# Altium PCB Daughter_Card.PcbDoc
Units mm, origin at the board's own origin, x right, y up, seen from the top; angles counter-clockwise.
Board outline 20.07 x 80.77 mm, 2 copper layers (Top Layer, Bottom Layer); 39 components, 14 nets, 102 pads, 39 vias.
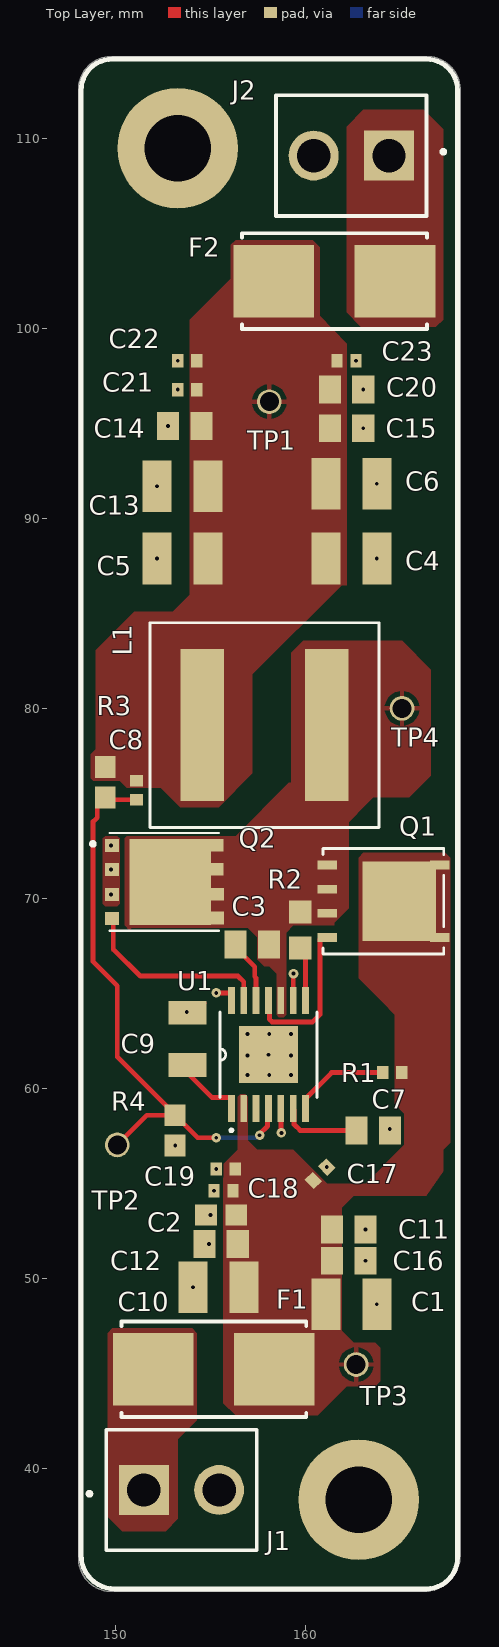
[diagram p0: Top Layer view]
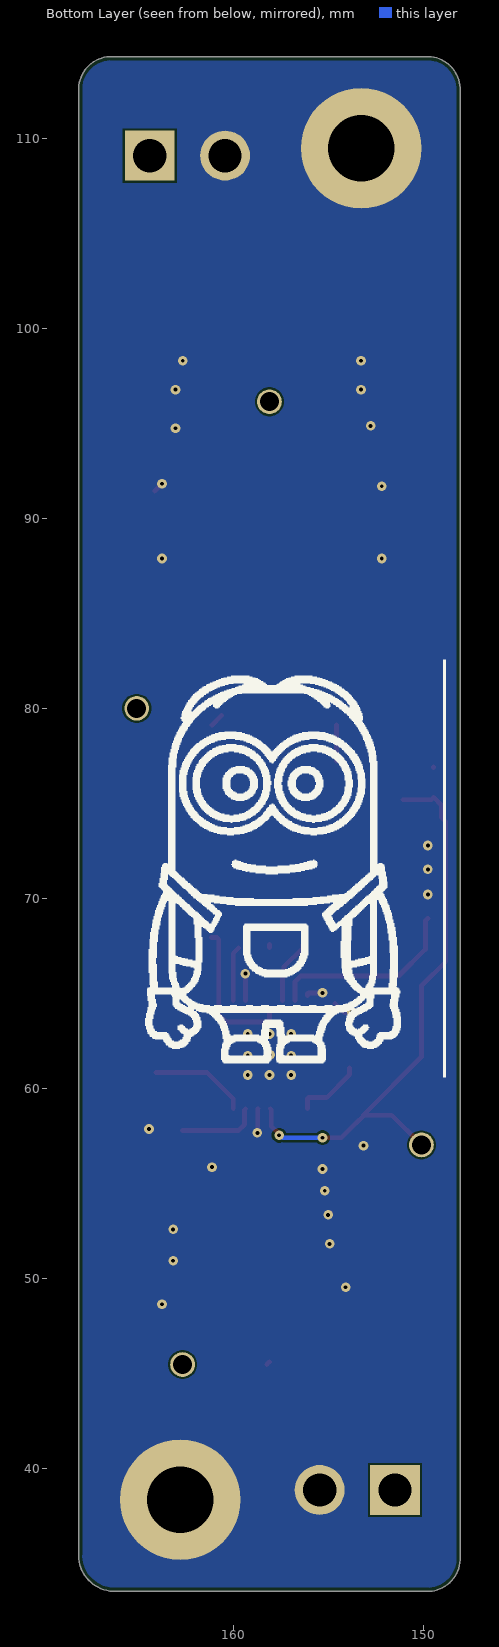
[diagram p1: Bottom Layer view, seen from below]

## Layer stack, top to bottom
Top Solder: solder mask 0.0102, Solder Resist, Dk 3.5
Top Layer: signal copper 0.0356
Dielectric 1: dielectric 0.32, FR-4, Dk 4.8
Bottom Layer: signal copper 0.0356
Bottom Solder: solder mask 0.0102, Solder Resist, Dk 3.5

## Board outline
148.082,35.179 ccw(c149.797,35.242) 149.86,33.528 166.37,33.528 ccw(c166.25,35.434) 168.156,35.555 168.156,112.641 ccw(c166.433,112.578) 166.37,114.3 149.733,114.3 ccw(c149.796,112.585) 148.082,112.522

## Design rules (kind name [scope] priority, off if disabled: settings)
BoardOutlineClearance [All] p1: gap=0.2 ignorepadtopadclearanceinfootprint=FALSE
Clearance "Stitching GND" [IsStitchingVia and InNet('GND') vs (IsVia and (Not IsStitchingVia)) Or IsPad] p1: gap=0.127 ignorepadtopadclearanceinfootprint=FALSE
Clearance [All] p2: gap=0.102 ignorepadtopadclearanceinfootprint=FALSE except(0.127: Arc-Via Track-Via SMDPad-Via THPad-Via Via-Via Via-Fill Via-Poly Via-Region Via-Text; 0.25: Arc-Hole Track-Hole SMDPad-Hole THPad-Hole Via-Hole Fill-Hole Poly-Hole Region-Hole Text-Hole)
ComponentClearance [All] p1: gap=0.102 collisioncheckmode=3 verticalgap=0.102 showdistances=TRUE
DiffPairsRouting [All] p1: maxlimit=0.102 minlimit=0.102 mostfreqgap=0.102 toplayer_minwidth=0.102 toplayer_maxwidth=1816.048 toplayer_prefwidth=0.102 bottomlayer_minwidth=0.102 bottomlayer_maxwidth=1816.048 bottomlayer_prefwidth=0.102 maxuncoupledlength=12.7
DiffPairsRouting USB [OnLayer('Top Layer') And InDifferentialPairClass('USB')] p2: maxlimit=0.127 minlimit=0.127 mostfreqgap=0.127 toplayer_minwidth=0.237 toplayer_maxwidth=0.237 toplayer_prefwidth=0.237 bottomlayer_minwidth=0.237 bottomlayer_maxwidth=0.237 bottomlayer_prefwidth=0.237 impedanceprofiledriven=TRUE impedanceprofileid={C8994B27-2D6B-4B4B-A1C4-DCAF0529D0FB} maxuncoupledlength=12.7
Height [All] p1: minheight=0 maxheight=1816.048 prefheight=12.7
HoleSize [All] p1: absolutevalues=TRUE maxlimit=6.3 minlimit=0.2 maxpercent=80.000 minpercent=20.000
HoleToHoleClearance [All] p1: gap=0.25 allowstackedmicrovias=FALSE
MinimumAnnularRing [All] p1: minimumring=0.076
MinimumSolderMaskSliver [All] p1: minsoldermaskwidth=0
PlaneClearance [All] p1: clearance=0.102
PlaneConnect PlaneConnectPowerPads [InPadClass('PowerPads')] p1: planeconnectstyle=Direct reliefexpansion=0.508 reliefentries=4 reliefconductorwidth=0.254 reliefairgap=0.254
PlaneConnect [All] p2: planeconnectstyle=Direct reliefexpansion=0.3 reliefentries=4 reliefconductorwidth=0.102 reliefairgap=0.102
PolygonConnect PolygonConnectPowerPads [All vs (InPadClass('PowerPads'))] p1: connectstyle=Direct reliefconductorwidth=0.254 reliefentries=4 polygonreliefangle="90 Angle" airgapwidth=0.254
PolygonConnect [All] p2: connectstyle=Direct reliefconductorwidth=0.102 reliefentries=4 polygonreliefangle="90 Angle" airgapwidth=0.102
RoutingVias [All] p1: holewidth=0.305 width=0.605 viastyle="Through Hole" minholewidth=0.3 minwidth=0.6 maxholewidth=0.405 maxwidth=0.705
SilkToSilkClearance [All] p1: silktosilkclearance=0
SilkToSolderMaskClearance [IsPad] p1: minsilkscreentomaskgap=0.102 clearancetoexposedcopper=TRUE
SolderMaskExpansion [All] p1: expansion=0.075 istentingtop=FALSE
SupplyNets "Schematic Supply Nets_6" [InNet('24V_OUT')] p1: voltage=0.000
SupplyNets "Schematic Supply Nets_5" [InNet('VBAT')] p2: voltage=0.000
SupplyNets "Schematic Supply Nets_4" [InNet('24V_OUT_FUSED')] p3: voltage=0.000
SupplyNets "Schematic Supply Nets_2" [InNet('VBAT_FUSED')] p4: voltage=0.000
SupplyNets "Schematic Supply Nets_3" [InNet('GND')] p5: voltage=0.000
Width [All] p1: maxlimit=0.508 minlimit=0.102 preferedwidth=0.254 minimp=50.000000 maximp=50.000000 favimp=50.000000
20 further rules are at their usual default settings.

## Components (designator, comment, footprint, x,y, rotation, side; value= is the part's Value field where it differs from the comment)
C1 "CL32B106KBJNNNE" CAP-1210 162.433,48.641 r180 top
C2 "GMC10X7S104K100NT" CAP-0603 155.575,53.34 r0 top
C3 "CC0805ZRY5V9BB474" CAP-0805 157.226,67.564 r0 top
C4 "CC1210KFX7R9BB475" CAP-1210 162.433,87.884 r180 top
C5 "CC1210KFX7R9BB475" CAP-1210 153.543,87.884 r0 top
C6 "CC1210KFX7R9BB475" CAP-1210 162.433,91.821 r180 top
C7 "CC0805KRX7R0BB153" CAP-0805 163.576,57.785 r180 top
C8 "CC0402FRNPO9BN241" CAP-0402 151.13,75.692 r90 top
C9 "CC1206KKX7R0BB225" CAP-1206 153.797,62.611 r270 top
C10 "CL32B106KBJNNNE" CAP-1210 155.448,49.53 r0 top
C11 "CC0805KKX7R9BB105" CAP-0805 162.306,52.578 r180 top
C12 "CC0805KRX7R9BB104" CAP-0805 155.575,51.816 r0 top
C13 "CL32B106KBJNNNE" CAP-1210 153.543,91.694 r0 top
C14 "CC0805KKX7R9BB105" CAP-0805 153.67,94.869 r0 top
C15 "CC0805KRX7R9BB104" CAP-0805 162.179,94.742 r180 top
C16 "GRM2195C1H103JA01D" CAP-0805 162.306,50.927 r180 top
C17 "CC0402KRX7R9BB102" CAP-0402 160.782,55.499 r225 top
C18 "CC0402JRNPO9BN101" CAP-0402 155.702,54.61 r0 top
C19 "CC0402JRNPO9BN100" CAP-0402 155.821,55.753 r0 top
C20 "GRM2195C1H103JA01D" CAP-0805 162.179,96.774 r180 top
C21 "CC0402KRX7R9BB102" CAP-0402 153.797,96.774 r0 top
C22 "CC0402JRNPO9BN101" CAP-0402 153.797,98.298 r0 top
C23 "CC0402JRNPO9BN100" CAP-0402 162.179,98.298 r180 top
F1 "01550900M" FUSE-0001 155.194,45.212 r0 top
F2 "01550900M" FUSE-0001 161.544,102.489 r0 top
J1 "HFWJ-02-02-T-S" SAMTEC_HFWJ-02-02-T-S 153.492,38.862 r180 top
J2 "HFWJ-02-02-T-S" SAMTEC_HFWJ-02-02-T-S 162.433,109.093 r0 top
L1 "XAL1010-153MED" IND_XAL1010_COC 157.861,79.121 r180 top
Q1 "NTMFS5C670NLT1G" "NTMFS5C670NLT1G_ONS - duplicate" 164.122,69.85 r0 top
Q2 "CSD19534Q5A" TRANS_CSD19534Q5A 152.583,70.866 r0 top
R1 "RC0402FR-07634KL" RES-0402 164.592,60.833 r0 top
R2 "RC0805FR-071K62L" RES-0805 159.748,68.332 r90 top
R3 "RC0603FR-07392KL" RES-0603 149.479,76.111 r90 top
R4 "RC0603FR-0710KL" CAP-0603 153.162,57.785 r90 top
TP1 "5003" TEST-POINT-0001#1 158.115,96.139 r0 top
TP2 "5003" TEST-POINT-0001#1 150.114,57.023 r0 top
TP3 "5003" TEST-POINT-0001#1 162.687,45.466 r0 top
TP4 "5003" TEST-POINT-0001#2 165.1,76.327 r0 top
U1 "LM3150MHE/NOPB" MXA14A 158.07,61.773 r90 top

## Footprints (in the part's own frame and the unit in brackets; to place one, negate y for a bottom-side part, rotate by r counter-clockwise, add the part's x,y. Pads: shape width x height; smd on the part's side, far side on the other; paste and mask are expansions set on the pad)
CAP-0402 [mm]
  rect 0.6x0.7 smd: 1(-0.5,0) 2(0.5,0)
  body extent -0.5,-0.22 0.5,0.23, height 0.5
CAP-0603 [mm]
  rect 1.15x1.1 smd: 1(-0.8,0) 2(0.8,0)
  body extent -0.8,-0.45 0.8,0.45, height 0.8
CAP-0805 [mm]
  rect 1.16x1.47 smd: 1(-0.88,0) 2(0.88,0)
  body extent -1,-0.63 1,0.63, height 0.94
CAP-1206 [mm]
  rect 1.25x2 smd: 1(-1.375,0) 2(1.375,0)
  body extent -1.6,-0.8 1.6,0.8, height 1.5
CAP-1210 [mm]
  rect 1.53x2.72 smd: 1(-1.341,0) 2(1.341,0)
  body extent -1.6,-1.25 1.6,1.25, height 2.7
FUSE-0001 [mil]
  rect 167x150 smd paste+0 mask+0: 1(-125.5,0) 2(125.5,0)
  silkscreen extent -192,-99 192,99, body extent -213,-103 213,103, height 10
IND_XAL1010_COC [mil]
  rect 91x315 smd paste+0 mask+0: 1(-129,0) 2(129,0)
  silkscreen extent -238,-212 238,212, body extent -233,-207 233,207, height 394
MXA14A [mil]
  rect 56x14 smd paste-28 mask+6.5: 1(-112,76.77) 2(-112,51.18) 3(-112,25.59) 4(-112,0) 5(-112,-25.59) 6(-112,-51.18) 7(-112,-76.77) 8(112,-76.77) 9(112,-51.18) 10(112,-25.59) 11(112,0) 12(112,25.59) 13(112,51.18) 14(112,76.77)
  rect 118x122 smd paste-61 mask-61: 15(0,0)
  silkscreen extent -160,-100 88,100, body extent -126,-101 126,101, height 43
"NTMFS5C670NLT1G_ONS - duplicate" [mil]
  rect 40x18 smd paste+0 mask+0: 1(-116.5,-75) 2(-116.5,-25) 2(-116.5,25) 2(-116.5,75) 3(116.5,-75) 3(116.5,75)
  rect 152.01x165.04 smd: 3(32.48,0)
  silkscreen extent -125,-110 125,110, body extent -124,-104 124,104, height 43
RES-0402 [mm]
  rect 0.6x0.7 smd: 1(-0.5,0) 2(0.5,0)
  body extent -0.5,-0.25 0.5,0.25, height 0.3
RES-0603 [mm]
  rect 1.15x1.1 smd: 1(-0.8,0) 2(0.8,0)
  body extent -0.8,-0.4 0.8,0.4, height 0.43
RES-0805 [mm]
  rect 1.2x1.2 smd: 1(-0.95,0) 2(0.95,0)
  body extent -1,-0.6 1,0.6, height 0.71
SAMTEC_HFWJ-02-02-T-S [mil]
  rect 103.5x103.5 / inner round 103.5 / far side rect 103.5x103.5 hole 69: 01(78,0)
  round 103.5 hole 69: 02(-78,0)
  silkscreen extent -156,-125 195,125
TEST-POINT-0001#1 [mm] "2024 miniature test point"
  round 1.3 hole 1: 1(0,0)
  body extent -1.27,-1.27 1.27,1.27, height 4.57
TEST-POINT-0001#2 [mm] "2024 miniature test point"
  round 1.3 hole 1: 1(0,3.673)
  body extent -1.27,-1.27 1.27,1.27, height 4.57
TRANS_CSD19534Q5A [mm]
  rect 0.75x0.675 smd paste-1: 1(-2.752,-1.917) 2(-2.752,-0.66) 2(-2.752,0.66) 2(-2.752,1.917)
  rect 0.6x0.6 smd paste-1 mask+0: 3(0,0)
  rect 4.295x4.51 smd: 3(0.325,0)
  rect 0.7x0.655 smd: 3(2.775,0.675) 3(2.775,1.925) 3(2.8,-0.65)
  rect 0.7x0.7 smd: 3(2.8,-1.9)
  silkscreen extent -3.85,-2.58 2.88,2.58

## Part data
C1 C10 C13: library part CAP-10U-0002, "CAP CER 10UF 50V X7R 1210", Capacitance="10 uF", Voltage=50V, ComponentLink1Description=Datasheet, ComponentLink1URL=https://mm.digikey.com/Volume0/opasdata/d220001/medias/docus/41/CL32B106KBJNNNE_Spec.pdf, Device Class=Ceramic, Size=1210
C2: library part CAP-100N-0001, "0.1 µF ±10% 100V Ceramic Capacitor X7S 0603 (1608 Metric)", Capacitance="100 nF", Voltage=100V
C3: library part CAP-470N-0002, "0.47 µF -20%, +80% 50V Ceramic Capacitor Y5V (F) 0805 (2012 Metric)", Capacitance="470 n", Voltage="50 V"
C4 C5 C6: library part CAP-4.7U-0003, "4.7 µF ±10% 50V Ceramic Capacitor X7R 1210 (3225 Metric)", Capacitance=4.7u, Voltage=50V
C7: library part CAP-15N-0001, "0.015 µF ±10% 100V Ceramic Capacitor X7R 0805 (2012 Metric)", Capacitance=15n, Voltage="100 V"
C8: library part CAP-240P-0001, "240 pF ±1% 50V Ceramic Capacitor C0G, NP0 0402 (1005 Metric)", Capacitance=240p, Voltage=50V
C9: library part CAP-2.2U-0001, "CAP CER 2.2UF 100V X7R 1206", Capacitance=2.2uF, Voltage=100V, ComponentLink1Description=Datasheet, ComponentLink1URL=https://www.yageo.com/upload/media/product/productsearch/datasheet/mlcc/UPY-GPHC_X7R_6.3V-to-250V_24.pdf, Device Class=Ceramic, Size=1206
C11 C14: library part CAP-1U-0001, "1 µF ±10% 50V Ceramic Capacitor X7R 0805 (2012 Metric)", Capacitance="1 uF", Voltage="50 V"
C12 C15: library part CAP-100N-0002, "0.1 µF ±10% 50V Ceramic Capacitor X7R 0805 (2012 Metric)", Capacitance="100 nF", Voltage="50 V"
C16 C20: library part CAP-10N-0001, "CAP CER 10000PF 50V C0G/NP0 0805", Capacitance=10nF, Voltage=50V, ComponentLink1Description=Datasheet, ComponentLink1URL=https://search.murata.co.jp/Ceramy/image/img/A01X/G101/ENG/GRM2195C1H103JA01-01.pdf, Device Class=Ceramic, Size=0805
C17 C21: library part CAP-1N-0001, "1000 pF ±10% 50V Ceramic Capacitor X7R 0402 (1005 Metric)", Capacitance="1 nF", Voltage="50 V"
C18 C22: library part CAP-100P-0001, "CAP CER 100PF 50V C0G/NPO 0402", Capacitance="100 pF", Voltage=50V, ComponentLink1Description=Datasheet, ComponentLink1URL=https://www.yageo.com/upload/media/product/productsearch/datasheet/mlcc/UPY-GP_NP0_16V-to-50V_18.pdf, Device Class=Ceramic, Size=0402
C19 C23: library part CAP-10P-0001, "10 pF ±5% 50V Ceramic Capacitor C0G, NP0 0402 (1005 Metric)", Capacitance="10 pF", Voltage="50 V"
F1 F2: library part FUSE-0001, "FUSE BLOK CARTRIDGE 125V 10A SMD", Fuse Current=8A, Voltage Rating=125V, ComponentLink2Description=Datasheet, ComponentLink2URL=https://www.littelfuse.com/~/media/electronics/datasheets/fuses/littelfuse_fuse_154_154t_154l_154tl_datasheet.pdf.pdf
J1 J2: library part CONN-2POS-0007, "Conn Unshrouded Header HDR 2 POS 3.96mm Solder ST Thru-Hole Bulk", Package=None, Check_prices=https://www.snapeda.com/parts/HFWJ-02-02-T-S/Samtec/view-part/?ref=eda, MF=Samtec, MP=HFWJ-02-02-T-S, SnapEDA_Link=https://www.snapeda.com/parts/HFWJ-02-02-T-S/Samtec/view-part/?ref=snap
L1: library part IND-15u-0001, "15 µH Shielded Molded Inductor 9.9 A 18.6mOhm Max Nonstandard", Inductor=15u, Manufacturer_Name=Coilcraft, Resistance="18.6 mOhm", Copyright="Copyright (C) 2025 Ultra Librarian. All rights reserved.", Manufacturer_Part_Number=XAL1010-153MED
Q1: library part NMOS-71A-0001, "N-Channel 60 V 17A (Ta), 71A (Tc) 3.6W (Ta), 61W (Tc) Surface Mount 5-DFN (5x6) (8-SOFL)", Manufacturer_Name=onsemi, Max Current="71 A", Max Voltage="60 V", Copyright="Copyright (C) 2025 Ultra Librarian. All rights reserved.", Manufacturer_Part_Number=NTMFS5C670NLT1G, RefDes=RefDes, Type=Type
Q2: library part NMOS-44A-0001, "N-Channel 100 V 44A (Tc) 3.2W (Ta), 63W (Tc) Surface Mount 8-VSONP (5x6)", Current Max=44A, Package="VSONP-8 Texas Instruments", Voltage Max="100 V", Availability=Good, DigiKey-Purchase-URL=https://snapeda.com/shop?store=DigiKey&id=485742, MF="Texas Instruments", Mouser-Purchase-URL=https://snapeda.com/shop?store=Mouser&id=485742, MP=CSD19534Q5A, Price=None, SnapEDA_Link=https://www.snapeda.com/parts/CSD19534Q5A/Texas%20Instruments/view-part/485742/?ref=snap, Texas_Instruments-Purchase-URL=https://snapeda.com/shop?store=Texas+Instruments&id=485742
R1: library part RES-634k-0001, "634 kOhms ±1% 0.063W, 1/16W Chip Resistor 0402 (1005 Metric) Moisture Resistant Thick Film", Power=1/16W, Resistance=634k
R2: library part RES-1.62k-001, "1.62 kOhms ±1% 0.125W, 1/8W Chip Resistor 0805 (2012 Metric) Moisture Resistant Thick Film", Power="1/8 W", Resistance=1.62k
R3: library part RES-392k-0001, "392 kOhms ±1% 0.1W, 1/10W Chip Resistor 0603 (1608 Metric) Moisture Resistant Thick Film", Power=1/10, Resistance=392k
R4: library part RES-10k-0002, "10 kOhms ±1% 0.1W, 1/10W Chip Resistor 0603 (1608 Metric) Moisture Resistant Thick Film", Power="1/10 W", Resistance=10k
TP1 TP2 TP3 TP4: library part TEST-POINT-0001, "Oranange PC Test Point, Miniature Phoisphor Bronze Silver Plating Through Hole Mounting Type"
U1: library part IC-BUCK_0011, "6V to 42V Synchronous Step-Down Controller with Adjustable Output Voltage 14-HTSSOP -40 to 125", Manufacturer_Name="Texas Instruments", Copyright="Copyright (C) 2025 Ultra Librarian. All rights reserved.", Datasheet=https://www.ti.com/lit/gpn/lm3150, Manufacturer_Part_Number=LM3150MHE/NOPB, RefDes=RefDes, Type=Type

## Free pads (board coordinates)
  round 6.35 hole 3.5: 9(153.289,109.474) 9(162.814,38.354)

## Via types
v1: diameter 0.508, hole 0.203, Top Layer to Bottom Layer, 39 vias

## Nets (pads, with @x,y where several pads share a name; then routed paths per layer and width w, separated by ;. In a path a pad name is that pad's centre, name@x,y a point inside that pad or via, vN(x,y) a via of type N, cw(c..) or ccw(c..) an arc to the next point about the centre after c; other vN are vias at no path point)
24V_OUT: C4.2 C5.2 C6.2 C8.2 C13.2 C14.2 C15.2 C20.2 C21.2 C22.2 C23.2 F2.1 L1.2 R3.2 TP1.1 | length 1.9
  Top Layer w0.254: R3.2@149.479,76.886 R3.2 ; L1.2@154.584,77.221 L1.2
24V_OUT_FUSED: F2.2 J2.01
BST: C3.1 U1.12 | length 3.4
  Top Layer w0.254: C3.1 156.346,67.409 157.353,66.402 157.353,65.873 157.42,65.806 U1.12
FB_2: C8.1 R3.1 R4.2 TP2.1 U1.4 | length 30.7
  Top Layer w0.254: TP2.1 151.676,58.585 R4.2 153.162,58.61 150.114,61.658 150.114,65.405 148.844,66.675 148.844,74.041 149.056,74.253 149.056,74.888 R3.1 149.598,75.192 C8.1@151.08,75.192 ; R4.2@153.162,58.56 153.585,58.137 153.61,58.137 154.343,57.404 v1(155.321,57.404) ; v1(157.607,57.531) 157.607,57.6 158.019,58.012 158.019,58.877 U1.4
  Bottom Layer w0.254: v1(155.321,57.404) 157.411,57.404 157.538,57.531 v1(157.607,57.531)
GND: C1.1 C2.1 C4.1 C5.1 C6.1 C7.1 C9.1 C10.1 C11.1 C12.1 C13.1 C14.1 C15.1 C16.1 C17.1 C18.1 C19.1 C20.1 C21.1 C22.1 C23.1 J1.02 J2.02 pad.9 Q2.2 R4.1 U1.5 U1.9 U1.14 U1.15 | length 5.7
  Top Layer w0.254: C9.1 154.172,63.986 C9.1@154.67,64.484 ; C2.1@154.902,53.467 v1(155.029,53.34) ; C18.1@155.124,54.688 v1(155.202,54.61) ; v1(155.321,65.024) 156.069,65.024 156.12,64.973 U1.14@156.12,64.884 ; U1.5 158.735,58.913 158.735,57.673 v1(158.75,57.658) ; U1.9 159.377,64.625 159.377,66.032 v1(159.385,66.04) ; v1(163.774,91.821) C6.1@164.155,91.44 ; C7.1 C7.1@164.456,57.94
  other v1: 163.774,48.641 154.107,49.53 163.186,50.927 154.949,51.816 163.186,52.578 155.321,55.753 161.136,55.853 153.162,56.985 164.456,57.863 156.972,60.706 158.115,60.706 159.258,60.706 156.972,61.722 159.258,61.722 158.07,61.773 156.972,62.865 158.115,62.865 159.258,62.865 153.773,64.01 149.775,70.206 149.775,71.526 149.775,72.783 152.202,87.884 163.774,87.884 152.202,91.694 163.059,94.742 152.79,94.869 153.297,96.774 163.059,96.774 153.297,98.298 162.679,98.298
HG: Q1.1 U1.11 | length 7.7
  Top Layer w0.254: U1.11@158.121,64.033 158.121,63.643 158.264,63.5 160.401,63.5 160.782,63.881 160.782,67.843 160.884,67.945 Q1.1
ILIM: R2.1 U1.8 | length 2.9
  Top Layer w0.254: R2.1 160.02,67.109 U1.8
LG: Q2.1 U1.13 | length 10.3
  Top Layer w0.254: Q2.1@149.775,68.949 149.902,68.822 149.902,67.298 149.939,67.298 151.324,65.913 156.464,65.913 156.77,65.607 U1.13
NetC9_2: C9.2 U1.1 | length 3.6
  Top Layer w0.254: C9.2@153.902,61.087 153.902,60.712 155.102,59.512 156.069,59.512 156.12,59.461 U1.1
RON: R1.1 U1.7 | length 5.2
  Top Layer w0.254: U1.7 160.02,59.461 161.392,60.833 R1.1
SS: C7.2 U1.6 | length 4.3
  Top Layer w0.254: U1.6 159.421,58.877 159.421,58.099 159.735,57.785 C7.2
SW: C3.2 L1.1 Q1.2 Q2.3 R2.2 TP4.1 U1.10 | length 0.9
  Top Layer w0.254: C3.2@158.106,67.409 C3.2 ; L1.1@160.63,79.629 L1.1
VBAT: F1.1 J1.01
VBAT_FUSED: C1.2 C2.2 C10.2 C11.2 C12.2 C16.2 C17.2 C18.2 C19.2 F1.2 Q1.3 R1.2 TP3.1 U1.2 | length 0.2
  Top Layer w0.254: F1.2@158.115,45.606 F1.2@158.255,45.466
pads on no net: U1.3

## Polygon pours and split planes (outlines as drawn)
GND on Top Layer "GND_L01_P049" (solid, remove dead copper, pour order 49): 150.114,69.596 149.479,69.596 149.352,69.723 149.352,73.152 149.479,73.279 150.114,73.279 150.241,73.152 150.241,69.723 150.241,73.152 150.241,69.723
SW on Top Layer "SW_L01_P048" (solid, pour order 48): 158.496,63.881 158.623,63.754 158.877,63.754 159.004,63.881 159.004,68.199 159.385,68.58 161.544,68.58 161.544,68.707 162.306,69.469 162.306,83.566 159.893,83.566 159.258,82.931 159.258,76.073 159.131,76.073 156.337,73.279 150.622,73.279 150.495,73.152 150.495,68.58 150.749,68.326 150.876,68.453 156.972,68.453 157.48,67.945 157.48,66.802 157.861,66.421 158.115,66.421 158.496,66.04
VBAT_FUSED on Top Layer "VBAT_FUSED_L01_P044" (solid, pour order 44): 162.814,65.786 162.814,72.136 163.068,72.39 167.386,72.39 167.64,72.136 167.64,57.15 167.259,56.769 165.989,56.769 165.989,62.611
VBAT_FUSED on Top Layer "VBAT_FUSED_L01_P042" (solid, remove dead copper, pour order 42): 164.846,67.056 164.719,66.929 164.719,59.182 165.227,58.674 165.227,57.023 163.195,54.991 160.909,54.991 160.274,54.356 160.274,53.848 160.528,53.594 161.798,53.594 162.56,54.356 166.37,54.356 167.259,55.626 167.259,56.007 167.259,64.008 165.481,65.786 165.481,66.929 165.354,67.056
VBAT_FUSED on Top Layer "VBAT_FUSED_L01_P041" (solid, remove dead copper, pour order 41): 156.337,42.799 160.655,42.799 162.179,44.323 163.703,44.323 163.957,44.577 163.957,46.355 163.703,46.609 162.56,46.609 161.925,47.244 161.925,54.229 159.385,56.769 157.48,56.769 156.972,57.277 156.972,59.563 156.845,59.69 156.591,59.69 156.464,59.563 156.464,56.769 155.702,56.007 155.702,43.434
VBAT on Top Layer "VBAT_L01_P039" (solid, remove dead copper, pour order 39): 149.606,37.465 150.368,36.703 152.654,36.703 153.289,37.338 153.289,41.529 154.305,42.545 154.305,47.117 154.051,47.371 149.86,47.371 149.606,47.117
24V_OUT_FUSED on Top Layer "24V_OUT_FUSED_L01_P038" (solid, remove dead copper, pour order 38): 162.179,100.838 162.941,100.076 166.878,100.076 167.259,100.457 167.259,110.49 166.243,111.506 163.068,111.506 162.179,110.617
24V_OUT on Top Layer "Top Layer-24V_OUT" (solid, pour order 36): 153.416,74.803 155.448,74.803 157.226,76.581 157.226,81.788 161.925,86.487 162.179,86.487 162.179,99.187 160.782,100.666 160.782,104.267 160.401,104.648 156.337,104.648 156.083,104.394 156.083,102.616 153.924,100.457 153.924,85.979 153.035,85.09 151.003,85.09 148.971,83.058 148.971,77.851 148.717,77.597 148.717,76.327 148.844,76.2 150.241,76.2 150.622,75.819 152.4,75.819 153.035,75.184
SW on Top Layer "SW_L01_P033" (solid, remove dead copper, pour order 33): 163.576,75.311 165.481,75.311 166.624,76.454 166.624,82.042 165.1,83.566 161.798,83.566 161.798,73.533
GND on Bottom Layer "GND_L02_P043" (solid, remove dead copper, pour order 43): 148.082,35.179 ccw(c149.797,35.242) 149.86,33.528 166.37,33.528 ccw(c166.25,35.434) 168.156,35.555 168.156,112.641 ccw(c166.433,112.578) 166.37,114.3 149.733,114.3 ccw(c149.796,112.585) 148.082,112.522

## Silkscreen, mask and mechanical layers (free items; w line width, h text height)
Top Overlay:
  lines w0.254: 148.209,35.433 ccw(c149.987,35.433) 149.987,33.655 166.37,33.655 ccw(c166.37,35.306) 168.021,35.306 168.021,112.522 ccw(c166.37,112.522) 166.37,114.173 149.86,114.173 ccw(c149.86,112.522) 148.209,112.522 148.209,35.433
Bottom Overlay:
  drawing of 9 lines, arcs and shapes, not listed